# Altium PCB FPv1.3.5.PcbDoc (part 5 of 9)
Units mil, origin at the board's own origin, x right, y up, seen from the top; angles counter-clockwise.
Board outline 3200 x 2100 mil, 4 copper layers (Top Layer, GROUND PLANE, POWER PLANE, Bottom Layer); 98 components, 183 nets, 614 pads, 312 vias.
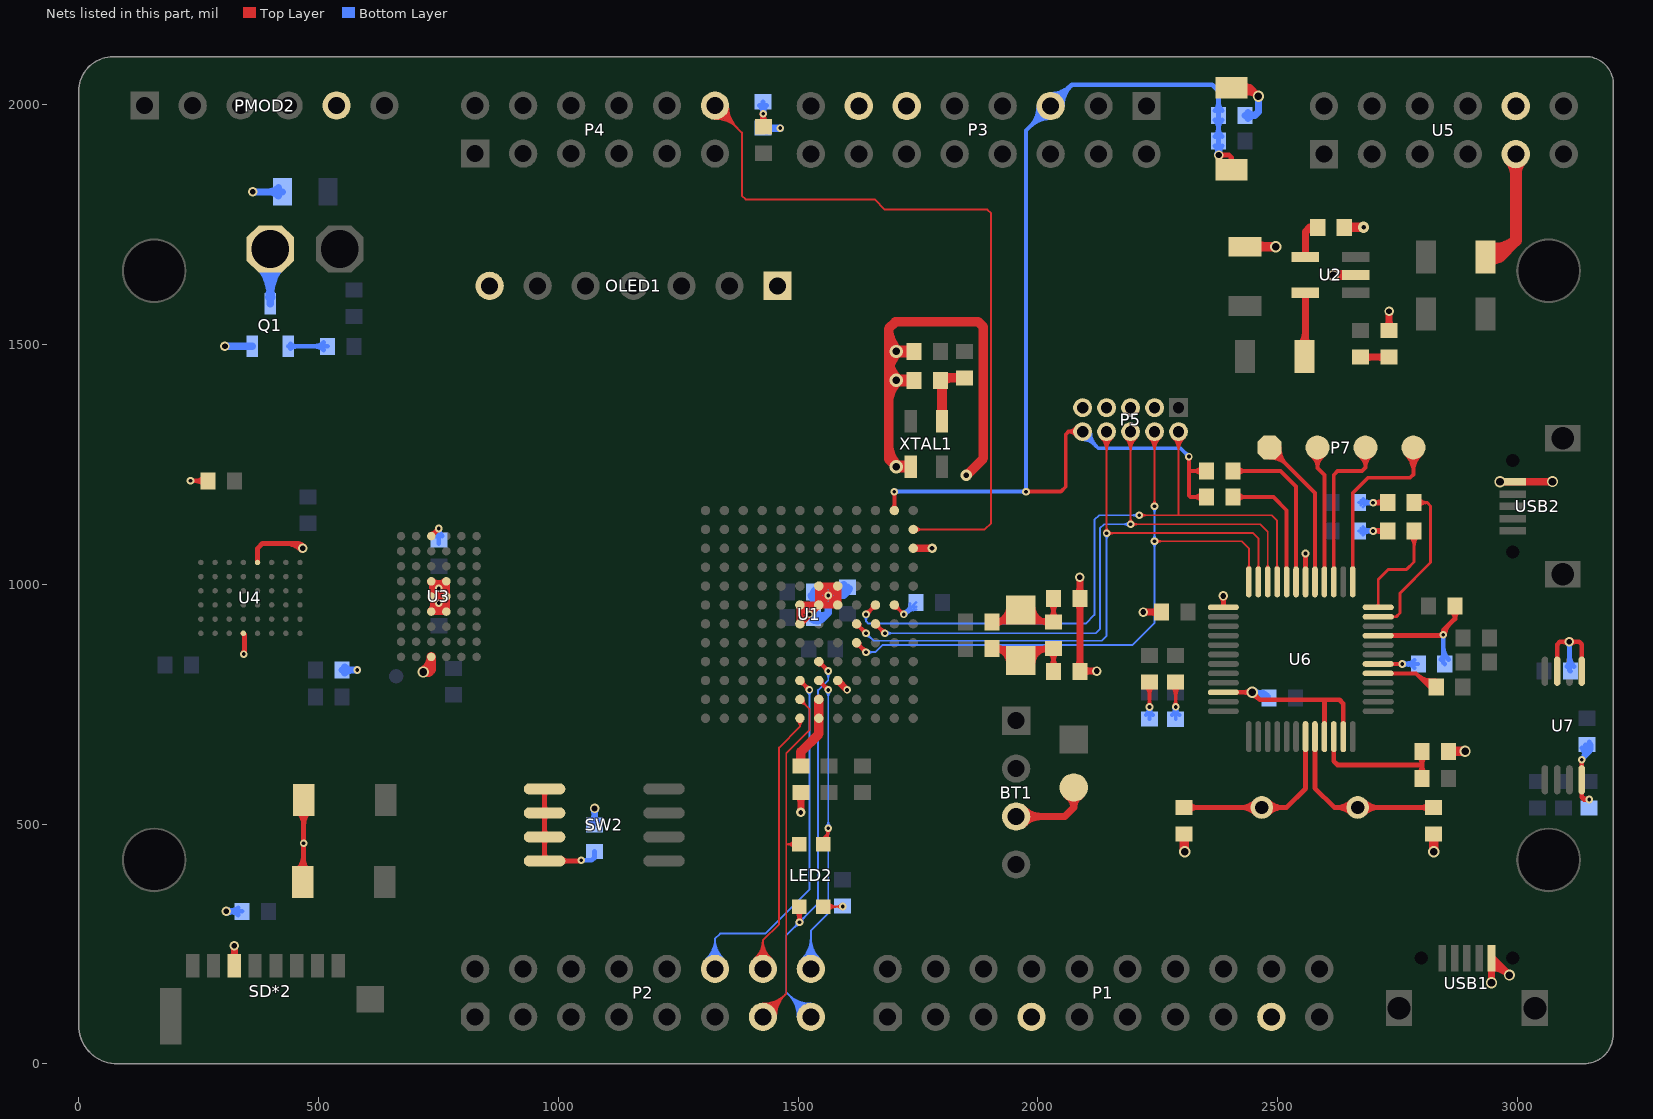
[diagram p7: the nets of this part, all layers, seen from the top]

## Via types
v1: diameter 15.87, hole 7.87, Top Layer to Bottom Layer, tented both sides, 261 vias
v2: diameter 19.8, hole 11.81, Top Layer to Bottom Layer, tented both sides, 25 vias
v3: diameter 23.62, hole 15.75, Top Layer to Bottom Layer, tented both sides, 11 vias
v4: diameter 20, hole 13, Top Layer to Bottom Layer, tented both sides, 5 vias
v5: diameter 27.68, hole 15.75, Top Layer to Bottom Layer, tented both sides, 3 vias
v6: diameter 23.74, hole 15.75, Top Layer to Bottom Layer, tented both sides, 2 vias
v7: diameter 19.8, hole 9.84, Top Layer to Bottom Layer, tented both sides, 2 vias
v8: diameter 23.62, hole 9.45, Top Layer to Bottom Layer, tented both sides, 1 vias
v9: diameter 17.24, hole 9.06, Top Layer to Bottom Layer, tented both sides, 1 vias
v10: diameter 23.74, hole 11.81, Top Layer to Bottom Layer, tented both sides, 1 vias

## Nets (pads, with @x,y where several pads share a name; then routed paths per layer and width w, separated by ;. In a path a pad name is that pad's centre, name@x,y a point inside that pad or via, vN(x,y) a via of type N, cw(c..) or ccw(c..) an arc to the next point about the centre after c; other vN are vias at no path point) (continued)
FTM3_CH3: P2.12 U1.F3 | length 1207.9
  Top Layer w4: U1.F3@1503.94,791.37 cw(c1503.94,772.44) 1517.32,785.82 ; U1.F3@1503.94,799.21 v1(1523.62,779.53) ; U1.F3@1507.69,791.39 cw(c1496.78,772.49) v1@1517.88,778.02 ; U1.F3@1511.76,795.46 ccw(c1530.66,806.37) v1@1525.13,785.27 ; U1.F3@1511.78,799.21 ccw(c1530.71,799.21) 1517.33,785.82 ; 1515.98,786.6 cw(c1509.81,775.91) v1@1521.75,779.04 ; 1516.17,786.49 cw(c1514.09,782.88) v1@1518.02,781.49 ; 1516.55,787.17 ccw(c1527.24,793.34) v1@1524.11,781.4 ; 1516.66,786.98 ccw(c1520.27,789.06) v1@1521.66,785.13 ; v1@1517.69,779.53 ccw(c1503.37,779.53) 1513.49,789.66 ccw(c1523.62,799.78) v1@1523.62,785.46 ; 1517.19,785.9 ccw(c1520.42,791.49) 1522.09,785.26 cw(c1520.42,791.49) 1517.19,785.9 ; 1517.25,785.96 cw(c1511.66,782.73) 1517.89,781.06 ccw(c1511.66,782.73) 1517.25,785.96
  Bottom Layer w4: P2.12@1308.1,218.03 ccw(c1268.42,260.86) 1326.81,260.86 ; P2.12@1310.82,215.09 ccw(c1276.9,251.7) 1326.81,251.7 ccw(c1376.72,251.7) P2.12@1342.8,215.09 ; P2.12@1313.54,212.16 ccw(c1285.39,242.55) 1326.81,242.55 ccw(c1368.23,242.55) P2.12@1340.08,212.16 ; P2.12@1316.26,209.23 ccw(c1293.87,233.39) 1326.81,233.39 ccw(c1359.75,233.39) P2.12@1337.36,209.23 ; P2.12@1326.81,197.83 1326.81,260.87 ; P2.12@1345.52,218.03 cw(c1385.21,260.86) 1326.81,260.86 ; v1@1519.43,775.33 cw(c1509.3,765.2) 1523.62,765.2 cw(c1537.95,765.2) v1@1527.82,775.33 ; v1(1523.62,779.53) 1523.62,363.19 1432.09,271.65 1337.6,271.65 1326.81,260.87
FTM3_CH4: LED2.4 P2.13 U1.F2 | length 1159.7
  Top Layer w4: P2.13@1426.81,97.83 1475.39,146.42 1475.39,457.68 ; P2.13@1426.81,113.36 ccw(c1426.81,150.85) 1453.32,124.34 ccw(c1479.83,97.83) P2.13@1442.34,97.83 ; P2.13@1426.81,117.36 ccw(c1426.81,164.51) 1460.15,131.17 ccw(c1493.48,97.83) P2.13@1446.34,97.83 ; P2.13@1426.81,121.36 ccw(c1426.81,178.16) 1466.97,138 ccw(c1507.14,97.83) P2.13@1450.34,97.83 ; P2.13@1426.81,125.36 ccw(c1426.81,191.82) 1473.8,144.83 ccw(c1520.8,97.83) P2.13@1454.34,97.83 ; LED2.4@1492.43,449.57 ccw(c1475.43,435.92) 1475.43,457.72 ; LED2.4@1492.43,465.86 cw(c1475.43,479.51) 1475.43,457.72 ; LED2.4@1495.54,452.08 ccw(c1483.78,442.63) 1483.78,457.72 ccw(c1483.78,472.81) LED2.4@1495.54,463.35 ; LED2.4@1502.56,457.72 1475.43,457.72 ; U1.F2@1503.94,752 cw(c1503.94,733.07) 1517.33,746.45 ; U1.F2@1503.94,759.84 1523.62,740.16 1523.62,695.87 1475.39,647.64 1475.39,457.68 ; U1.F2@1511.78,759.84 ccw(c1530.71,759.84) 1517.32,746.45 ; 1475.39,457.68 1475.43,457.72
FTM3_CH5: P2.14 U1.F1 | length 856.8
  Top Layer w4: P2.14@1408.94,218.77 ccw(c1375.88,257.52) 1426.81,257.52 ; P2.14@1411.54,215.73 ccw(c1383.28,248.84) 1426.81,248.84 ccw(c1470.34,248.84) P2.14@1442.08,215.73 ; P2.14@1414.13,212.69 ccw(c1390.68,240.17) 1426.81,240.17 ccw(c1462.94,240.17) P2.14@1439.49,212.69 ; P2.14@1416.73,209.65 ccw(c1398.08,231.5) 1426.81,231.5 ccw(c1455.54,231.5) P2.14@1436.89,209.65 ; P2.14@1426.81,197.83 1426.81,257.52 ; P2.14@1444.68,218.77 cw(c1477.74,257.52) 1426.81,257.52 ; U1.F1@1498.66,714.67 cw(c1487.85,702.76) 1503.94,702.76 ; U1.F1@1503.94,720.47 1503.94,702.76 ; U1.F1@1509.21,714.67 ccw(c1520.02,702.76) 1503.94,702.76 ; 1426.81,257.52 1460.63,291.34 1460.63,659.45 1503.94,702.76
FTM3_CH6: LED2.1 P2.15 U1.G4 | length 1523.6
  Top Layer w4: LED2.1@1493.37,318.52 cw(c1470.22,295.38) v1@1502.95,295.38 ; LED2.1@1496.2,321.35 cw(c1479.88,305.04) 1502.95,305.04 ; v1@1497.81,298.24 ccw(c1485.33,305.45) 1499.25,309.18 ; v1@1498.76,299.47 ccw(c1488.63,309.6) 1502.95,309.6 ccw(c1517.28,309.6) v1@1507.15,299.47 ; 1499.29,309.05 ccw(c1513.03,312.74) v1@1505.92,300.41 ; v1@1499.99,300.41 ccw(c1493.71,311.28) 1505.83,308.03 ; v1@1502.95,293.31 LED2.1@1502.95,327.32 ; v1@1502.95,297.28 cw(c1532.99,297.28) LED2.1@1511.75,318.52 ; 1502.95,306.94 cw(c1523.34,306.94) LED2.1@1508.92,321.35 ; 1506.48,310.46 ccw(c1522.03,306.29) v1@1508.09,298.24 ; U1.G4@1543.31,830.74 cw(c1543.31,811.81) 1556.7,825.19 cw(c1570.08,838.58) U1.G4@1551.15,838.58 ; U1.G4@1543.31,838.58 v1(1562.99,818.9) ; U1.G4@1547.06,830.76 cw(c1536.15,811.86) v1@1557.25,817.39 ; U1.G4@1551.13,834.83 ccw(c1570.03,845.74) v1@1564.5,824.64 ; 1555.35,825.97 cw(c1549.18,815.28) v1@1561.12,818.41 ; 1555.54,825.86 cw(c1553.46,822.25) v1@1557.39,820.86 ; 1555.92,826.54 ccw(c1566.61,832.71) v1@1563.48,820.77 ; 1556.03,826.35 ccw(c1559.64,828.43) v1@1561.03,824.5 ; v1@1557.06,818.9 ccw(c1542.74,818.9) 1552.86,829.03 ccw(c1562.99,839.15) v1@1562.99,824.83 ; 1556.56,825.27 ccw(c1559.79,830.86) 1561.46,824.63 cw(c1559.79,830.86) 1556.56,825.27 ; 1556.62,825.33 cw(c1551.03,822.1) 1557.26,820.43 ccw(c1551.03,822.1) 1556.62,825.33
  Bottom Layer w4: v1@1497.02,295.28 cw(c1482.7,295.28) 1492.82,285.15 cw(c1502.95,275.02) v1@1502.95,289.34 ; P2.15@1499.28,97.83 ccw(c1432.83,97.83) 1479.82,144.83 ccw(c1526.81,191.82) P2.15@1526.81,125.36 ; v1@1502.95,301.21 ccw(c1502.95,315.53) 1513.08,305.4 ccw(c1523.21,295.28) v1@1508.89,295.28 ; P2.15@1503.28,97.83 ccw(c1446.48,97.83) 1486.65,138 ccw(c1526.81,178.16) P2.15@1526.81,121.36 ; P2.15@1507.28,97.83 ccw(c1460.14,97.83) 1493.48,131.17 ccw(c1526.81,164.51) P2.15@1526.81,117.36 ; P2.15@1511.28,97.83 ccw(c1473.8,97.83) 1500.3,124.34 ccw(c1526.81,150.85) P2.15@1526.81,113.36 ; P2.15@1526.81,97.83 1475.39,149.25 1475.39,267.72 1542,334.32 1542,779 1562.99,799.99 v1(1562.99,818.9) ; v1@1558.8,814.7 cw(c1548.67,804.57) 1562.99,804.57 cw(c1577.32,804.57) v1@1567.19,814.7
  other v1: 1502.95,295.28
FTM3_CH7: LED2.3 P2.16 U1.G3 | length 1330.8
  Top Layer w4: U1.G3@1543.31,791.37 cw(c1543.31,772.44) 1556.7,785.82 cw(c1570.08,799.21) U1.G3@1551.15,799.21 ; U1.G3@1543.31,799.21 v1(1562.99,779.53) ; U1.G3@1547.06,791.39 cw(c1536.15,772.49) v1@1557.25,778.02 ; LED2.3@1548.13,469.94 ccw(c1540.44,491.14) v1(1562.99,491.14) LED2.3@1562.99,468.15 ; LED2.3@1549.49,466.18 ccw(c1542.51,485.44) v1@1562.99,485.44 ; LED2.3@1550.85,462.42 ccw(c1544.58,479.73) 1562.99,479.73 ; U1.G3@1551.13,795.46 ccw(c1570.03,806.37) v1@1564.5,785.27 ; LED2.3@1552.22,458.66 ccw(c1546.65,474.02) 1562.99,474.02 ; 1555.35,786.6 cw(c1549.18,775.91) v1@1561.12,779.04 ; 1555.54,786.49 cw(c1553.46,782.88) v1@1557.39,781.49 ; 1555.92,787.17 ccw(c1566.61,793.34) v1@1563.48,781.4 ; 1556.03,786.98 ccw(c1559.64,789.06) v1@1561.03,785.13 ; v1@1557.06,779.53 ccw(c1542.74,779.53) 1552.86,789.66 ccw(c1562.99,799.78) v1@1562.99,785.46 ; v1@1558.37,487.42 cw(c1551.74,482.07) 1559.97,479.86 cw(c1568.2,477.66) v1@1565.13,485.61 ; v1@1558.61,487.15 cw(c1551.08,480.3) 1560.91,477.66 ; v1@1558.8,486.95 cw(c1548.67,476.82) 1562.99,476.82 cw(c1577.32,476.82) v1@1567.19,486.95 ; 1561.63,480.37 cw(c1570.6,477.97) v1@1565.96,486 ; 1556.56,785.9 ccw(c1559.79,791.49) 1561.46,785.26 cw(c1559.79,791.49) 1556.56,785.9 ; 1556.62,785.96 cw(c1551.03,782.73) 1557.26,781.06 ccw(c1551.03,782.73) 1556.62,785.96
  Bottom Layer w4: P2.16@1507.35,217.3 ccw(c1460.35,264.29) 1526.81,264.29 ccw(c1593.27,264.29) P2.16@1546.28,217.3 ; P2.16@1510.17,214.47 ccw(c1470.01,254.64) 1526.81,254.64 ccw(c1583.61,254.64) P2.16@1543.45,214.47 ; P2.16@1513,211.64 ccw(c1479.67,244.98) 1526.81,244.98 ccw(c1573.95,244.98) P2.16@1540.62,211.64 ; P2.16@1515.83,208.81 ccw(c1489.32,235.32) 1526.81,235.32 ccw(c1564.3,235.32) P2.16@1537.79,208.81 ; P2.16@1526.81,197.83 1526.81,277.8 1562.99,313.98 v1(1562.99,491.14) v1(1562.99,779.53) ; v1@1558.8,486.95 cw(c1548.67,476.82) 1562.99,476.82 cw(c1577.32,476.82) v1@1567.19,486.95 ; v1@1558.8,495.34 ccw(c1548.67,505.47) 1562.99,505.47 ccw(c1577.32,505.47) v1@1567.19,495.34 ; v1@1558.8,775.33 cw(c1548.67,765.2) 1562.99,765.2 cw(c1577.32,765.2) v1@1567.19,775.33
GND: BT1.3 C1.1 C2.1 C3.1 C4.1 C7.1 C8.2 C12.2 C13.1 C15.1 C16.1 C17.1 C18.1 C22.1 C24.2 C27.1 C28.1 C29.1 C32.2 C33.1 C34.1 C35.2 C36.1 C37.1 C38.1 OLED1.1 OLED1.7 P1.7 P1.17 P3.11 P3.13 P5.3 P5.5 P5.7 P5.9 P6.2 PMOD2.5 Q1.2 R6.1 R10.1 R30.1 R31.1 R34.1 S1.2 S2.2 S3.1 SD*2.6 U1.F6 U1.F7 U1.G7 U1.G8 U1.H3 U1.H7 U1.H8 U1.M10 U2.2 U3.A3 U3.D3 U3.D4 U3.E3 U3.E4 U3.F3 U3.F4 U3.J3 U4.D1 U4.E6 U5.9 U5.10 U6.9 U6.18 U6.25 U6.34 U6.45 U6.47 U7.5 U7.7 USB1.5 USB2.5 XTAL1.2 | length 8018.5
  Top Layer w10: v1(233.27,1215.55) C3.1@269.69,1215.55 ; C3.1@262.09,1207.95 ccw(c243.74,1189.6) 243.74,1215.55 ccw(c243.74,1241.5) C3.1@262.09,1223.15 ; v1@342.41,856.4 ccw(c334.54,864.28) 345.68,864.28 ; U4.E6@343,897.14 cw(c336.55,890.68) 345.68,890.68 ; U4.E6@343.5,897.64 345.68,895.46 345.68,855.52 v1(344.49,854.33) ; U4.D1@373.03,1045.28 373.03,1074.97 382.93,1084.87 457.13,1084.87 v2(467,1075) ; 431.35,1084.87 cw(c431.35,1039.35) v2@463.53,1071.53 ; S2.2@454.69,402.24 ccw(c419.83,437.1) 469.13,437.1 ; 455.49,1084.87 cw(c455.49,1063.49) v2@470.61,1078.61 ; S1.2@456.66,526.9 cw(c426.55,496.79) 469.13,496.79 cw(c511.72,496.79) S1.2@481.61,526.9 ; S2.2@461.76,395.16 ccw(c443.97,412.96) 469.13,412.96 ; v2@462.1,1075 ccw(c450.27,1075) 458.63,1083.37 ccw(c467,1091.73) v2@467,1079.9 ; S2.2@469.13,380.91 v1(469.13,459.65) S1.2@469.13,550.2 ; 469.13,427.59 ccw(c504.99,427.59) S2.2@479.64,402.24 ; U3.F3@735.24,942.91 U3.F3@739.93,947.6 ; U3.E3@735.24,970.55 cw(c735.24,961.24) 741.82,967.82 cw(c748.41,974.41) U3.E3@739.09,974.41 ; U3.D3@735.24,1002.05 cw(c735.24,992.73) 741.82,999.32 cw(c748.41,1005.91) U3.D3@739.09,1005.91 ; U3.D3@735.24,1005.91 738.19,1002.95 739.93,1001.22 750.49,990.65 v1@750.98,990.16 ; U3.A3@735.24,1100.39 v1(750.98,1116.14) ; U3.A3@735.24,1104.25 ccw(c735.24,1113.57) 741.82,1106.98 ccw(c748.41,1100.39) U3.A3@739.09,1100.39 ; U3.E3@738.19,977.36 U3.E3@735.24,974.41 739.93,969.72 v1@750.98,958.66 ; 742.62,967.03 ccw(c750.98,975.4) v1@750.98,963.56 ; 744.3,996.84 ccw(c750.98,1003.53) v1@750.98,994.07 ; U3.D4@762.04,1001.22 U3.D4@766.73,1005.91 ; v2@2383.35,971.93 cw(c2374.98,963.56) 2386.81,963.56 cw(c2398.64,963.56) v2@2390.28,971.93 ; U6.34@2386.81,774.61 v3(2446.85,774.61) 2462.6,758.86 2628.94,758.86 2636.81,750.98 U6.47@2636.81,682.09 ; U6.25@2386.81,951.77 v2(2386.81,975.39) ; v3@2442.03,769.79 ccw(c2430.41,758.16) 2430.41,774.61 ccw(c2430.41,791.05) v3@2442.03,779.42 ; v3@2446.85,767.8 cw(c2446.85,751.35) 2458.48,762.98 cw(c2470.1,774.61) v3@2453.66,774.61 ; v9@2555.51,1061.42 cw(c2549.33,1055.23) 2558.07,1055.23 cw(c2566.82,1055.23) v9@2560.63,1061.42 ; U6.18@2558.07,1004.92 v9(2558.07,1063.98) ; U6.45@2597.44,682.09 2597.44,756.89 ; U6.9@2709.65,892.72 2844.49,892.72 2845.47,893.7 v1(2845.47,894.68) 2845.47,903.47 2869.58,927.58 ; 2833.64,892.72 ccw(c2833.64,906.52) v1@2843.4,896.76 ; v1@2848.41,894.68 cw(c2876.7,894.68) 2856.69,914.69 ; C29.1@2862.27,944.33 cw(c2846.74,927.58) 2869.58,927.58 ; C29.1@2869.58,954.18 2869.58,927.58 ; C29.1@2876.89,944.33 ccw(c2892.43,927.58) 2869.58,927.58 ; U7.7@3082.84,818.54 3082.84,874.17 3088.58,879.92 v2(3108.27,879.92) 3128.94,879.92 3134.02,874.84 U7.5@3134.02,818.54 ; v2@3104.8,876.46 ccw(c3096.43,868.09) 3096.43,879.92 ccw(c3096.43,891.75) v2@3104.8,883.39 ; v2@3111.73,876.46 cw(c3120.1,868.09) 3120.1,879.92 cw(c3120.1,891.75) v2@3111.73,883.39
  Top Layer w15: SD*2.6@320.24,219.48 ccw(c309.24,230.48) 324.8,230.48 ; SD*2.6@324.69,204.21 324.8,204.33 v2(324.8,246.06) v2@324.69,245.94 ; 324.8,229.91 ccw(c339.56,229.91) SD*2.6@329.13,219.48 ; U3.F3@734.28,943.87 ccw(c720.64,957.51) 739.93,957.51 ; U3.E3@734.28,973.45 cw(c720.64,959.81) 739.93,959.81 ; U3.E3@734.28,975.37 ccw(c724.83,984.82) 738.19,984.82 ; U3.D3@734.28,1004.95 cw(c724.83,995.5) 738.19,995.5 ; U3.F3@735.24,942.91 U3.F4@766.73,942.91 ; U3.D3@736.2,1006.87 ccw(c749.84,1020.51) 749.84,1001.22 ; U3.E3@738.19,972.34 cw(c757.73,972.34) v1@751.13,990.73 ; U3.D3@738.19,1002.95 U3.E3@738.19,977.36 ; U3.F3@739.93,943.54 cw(c757.94,943.54) v1@751.15,960.23 ; U3.E3@739.93,969.72 739.93,947.6 v1@750.98,958.66 ; v1@750.55,991.12 ccw(c739.93,990.58) 739.93,1001.22 U3.D4@762.04,1001.22 ; v1@751.41,960.59 cw(c766.73,959.01) U3.E4@766.73,974.41 ; v1@751.42,991.12 cw(c762.04,990.58) U3.D4@762.04,1001.22 ; 752.13,1001.22 ccw(c752.13,1020.51) U3.D4@765.77,1006.87 ; U3.D4@766.73,1005.91 U3.E4@766.73,974.41 ; R30.1@1500.07,560.11 cw(c1485.99,546.03) 1505.91,546.03 cw(c1525.82,546.03) R30.1@1511.74,560.11 ; U1.F6@1503.94,917.32 U1.F6@1504.32,917.71 ; U1.F7@1503.94,956.69 U1.F7@1504.32,956.31 ; v7(1505.91,524.09) R30.1@1505.91,565.94 ; U1.H3@1582.68,799.21 v1(1602.36,779.53) ; U1.M10@1740.16,1074.8 v7(1779.53,1074.8) ; BT1.3@1954.72,515.55 2055.91,515.55 2074.8,534.45 ; BT1.3@1970.3,499.98 cw(c2007.9,462.37) 2007.9,515.55 cw(c2007.9,568.73) BT1.3@1970.3,531.13 ; P6.2@2062.38,557.99 cw(c2046.29,534.45) 2074.8,534.45 ; P6.2@2074.8,576.18 2074.8,534.45 ; C38.1@2081.77,825.32 ccw(c2067.69,839.4) 2087.6,839.4 ccw(c2107.51,839.4) 2093.43,825.32 ccw(c2108.94,840.83) 2108.94,818.9 ; C37.1@2081.77,962.28 cw(c2067.69,948.2) 2087.6,948.2 cw(c2107.51,948.2) C37.1@2093.43,962.28 ; C37.1@2081.77,977.88 ccw(c2067.69,991.96) 2087.6,991.96 ccw(c2107.51,991.96) C37.1@2093.43,977.88 ; P6.2@2087.23,557.99 ccw(c2103.32,534.45) 2074.8,534.45 ; v2(2087.6,1014.76) C37.1@2087.6,970.08 C38.1@2087.6,817.52 2088.98,818.9 v2(2123.03,818.9) ; C38.1@2093.43,813.66 cw(c2106.09,801) 2106.09,818.9 ; v2(2219.49,941.93) C28.1@2257.87,941.93 ; C28.1@2252.04,936.1 ccw(c2237.96,922.02) 2237.96,941.93 ccw(c2237.96,961.84) C28.1@2252.04,947.76 ; S3.1@2403.54,2035.08 2441.92,2035.08 ; S3.1@2414.44,2034.96 cw(c2427.61,2012.22) 2446.2,2030.8 ; S3.1@2421.96,2021.98 cw(c2437.74,1994.74) v6(2460,2017) 2441.92,2035.08 ; S3.1@2427.15,2026.96 cw(c2441.92,2017.58) 2441.92,2035.08 ; S3.1@2427.15,2043.2 ccw(c2441.92,2052.58) 2441.92,2035.08 ; R31.1@2726.45,1534.38 ccw(c2712.37,1548.46) 2732.28,1548.46 ccw(c2752.2,1548.46) R31.1@2738.12,1534.38 ; R31.1@2732.28,1528.54 v2(2732.28,1568.9) ; USB1.5@2945.79,215.41 cw(c2945.88,198.48) 2957.85,210.45 ; v3(2945.87,169.29) USB1.5@2945.87,220.47 ; USB1.5@2945.87,200.41 cw(c2946.15,147.93) v3(2983.27,185.04) USB1.5@2947.83,220.47 ; v3(2963.58,1213.58) USB2.5@2990.16,1213.58 v3@3070.42,1213.58 ; U3.E3@738.19,977.36 v1@750.98,990.16 ; U3.E3@738.19,977.36 741.14,974.41 U3.E4@766.73,974.41 ; v1@750.98,958.66 U3.F4@766.73,942.91 ; v1@750.98,958.66 U3.E4@766.73,974.41 ; v1@750.98,990.16 752.46,988.68 U3.E4@766.73,974.41 ; v1@750.98,990.16 U3.D4@762.04,1001.22 ; U3.F4@766.73,942.91 U3.E4@766.73,974.41 ; U1.F6@1504.32,917.71 U1.F7@1504.32,956.31 ; U1.F6@1504.32,917.71 v1(1523.62,937.01) ; U1.F7@1504.32,956.31 U1.G7@1542.92,956.31 ; U1.F7@1504.32,956.31 v1(1523.62,937.01) ; v1(1523.62,937.01) U1.G7@1542.92,956.31 ; U1.G7@1542.92,956.31 U1.G7@1543.31,956.69 ; U1.G7@1542.92,956.31 1543.31,956.31 U1.G7@1543.31,956.69 ; U1.G7@1543.31,956.69 U1.H7@1582.68,956.69 ; U1.G7@1543.31,956.69 U1.G8@1543.31,996.06 ; U1.G7@1543.31,956.69 v1(1562.99,976.38) ; U1.G8@1543.31,996.06 U1.H8@1582.68,996.06 ; U1.G8@1543.31,996.06 v1(1562.99,976.38) ; v1(1562.99,976.38) U1.H7@1582.68,956.69 ; v1(1562.99,976.38) U1.H8@1582.68,996.06 ; U1.H7@1582.68,956.69 U1.H8@1582.68,996.06
  Top Layer w20: v3@717.63,818.51 ccw(c701.03,848.42) U3.J3@735.24,848.43 ; v3(718.5,816.93) 730.31,816.93 735.24,821.85 ; v3@719.19,818.61 ccw(c724.77,832.32) 735.24,821.85 ; U3.J3@735.24,848.43 735.24,821.85 ; 1689,1292.3 ccw(c1751.95,1292.3) v5@1707.44,1247.79 ; 1689,1377.97 cw(c1751.95,1377.97) v5@1707.44,1422.48 ; 1689,1438.01 cw(c1751.95,1438.01) v5@1707.44,1482.52 ; 1689,1472.43 ccw(c1751.95,1472.43) v5@1707.44,1427.91 ; 1689,1532.47 ccw(c1751.95,1532.47) v5@1707.44,1487.95 ; v5(1704.72,1245.07) 1689,1260.8 1689,1533 1703,1547 1876,1547 1886.43,1536.57 1886.43,1262.43 v10(1851,1227) ; C33.1@2305.12,479.33 2305.12,442.91 v3(2306.1,441.93) ; C12.2@2433.07,1703.74 v3(2496.06,1703.74) ; C12.2@2453.41,1696.2 cw(c2471.62,1677.98) 2471.62,1703.74 cw(c2471.62,1729.5) C12.2@2453.41,1711.28 ; v3(2616.14,1643.7) 2617.13,1644.69 U2.2@2662.56,1644.69 ; C13.1@2638.78,1744.09 v8(2679.13,1744.09) ; C35.2@2820.74,475.27 cw(c2808.55,463.08) 2825.79,463.08 ; C35.2@2824.8,479.33 2825.79,478.35 v3(2825.79,441.93) ; C24.2@2856.3,651.57 v3(2890.75,651.57)
  Top Layer w25: v5@1692,1485.24 v5(1704.72,1485.24) C27.1@1742.13,1485.24 ; v5@1693,1425.2 v5(1704.72,1425.2) C36.1@1742.13,1425.2 ; v5(1704.72,1245.07) XTAL1.2@1735.22,1245.07 ; C8.2@2927.29,1680.06 ccw(c2940.84,1717.13) 2968.75,1689.22 ; C8.2@2933.07,1682.09 2961.61,1682.09 2996.46,1716.93 ; C8.2@2935.88,1703.54 ccw(c2955.67,1757.71) 2996.46,1716.93 ; U5.9@2984.42,1884.61 cw(c2955.35,1855.55) 2996.46,1855.55 cw(c3037.56,1855.55) U5.9@3008.5,1884.61 ; U5.9@2996.46,1896.65 2996.46,1716.93
  Bottom Layer w10: v2(308.07,317.91) C17.1@340.55,317.91 ; v2@310.52,313.67 cw(c319.32,298.42) 323.88,315.43 ; v2@310.52,322.16 ccw(c319.32,337.41) 323.88,320.4 ; v2@311.54,314.45 cw(c319.9,306.08) 319.9,317.91 cw(c319.9,329.75) v2@311.54,321.38 ; C17.1@332.95,310.31 ccw(c314.6,291.97) 314.6,317.91 ccw(c314.6,343.86) C17.1@332.95,325.51 ; C15.1@743.92,1100.62 ccw(c730.4,1116.14) v1(750.98,1116.14) ; v1(750.98,991.14) v1@754.92,991.14 ; C15.1@750.98,1084.65 C15.1@750.98,1092.52 v1(750.98,1116.14) ; C15.1@758.05,1100.62 cw(c771.57,1116.14) v1(750.98,1116.14) ; R6.1@1068.19,505.63 ccw(c1049.84,523.98) 1075.79,523.98 ccw(c1101.74,523.98) R6.1@1083.39,505.63 ; v2@1071.54,530.03 cw(c1054.79,520.36) 1073.48,515.35 ; v2@1072.32,529.01 cw(c1063.95,520.65) 1075.79,520.65 cw(c1087.62,520.65) v2@1079.25,529.01 ; R6.1@1075.79,498.03 v2(1075.79,532.48) ; 1078.1,515.35 cw(c1096.79,520.36) v2@1080.03,530.03 ; v3@2450.49,768.85 cw(c2458.16,756.74) 2461.87,770.58 cw(c2465.58,784.43) v3@2452.88,777.77 ; v3@2451.67,769.79 cw(c2463.29,758.16) 2463.29,774.61 cw(c2463.29,791.05) v3@2451.67,779.42 ; 2464.06,774.61 cw(c2464.06,754.38) C22.1@2481.63,764.39 ; C22.1@2470.47,774.61 v3(2446.85,774.61) cw(c2446.85,744.57) C22.1@2472.95,759.44 ; C32.2@2840.83,843.23 ccw(c2829.61,854.45) 2845.47,854.45 ; 2845.47,868.71 ccw(c2881.5,868.71) C32.2@2856.03,843.23 ; v1(2845.47,894.68) 2845.47,836.61 C32.2@2848.43,833.66 ; C34.1@3102.79,828.11 ccw(c3089.58,841.33) 3108.27,841.33 ; v2@3104.8,876.46 cw(c3096.43,868.09) 3108.27,868.09 cw(c3120.1,868.09) v2@3111.73,876.46 ; 3108.27,851.59 ccw(c3141.48,851.59) C34.1@3117.99,828.11 ; v2(3108.27,879.92) 3108.27,820.67 C34.1@3110.39,818.54
  Bottom Layer w15: v2(305.12,1496.06) Q1.2@362.2,1496.06 ; v2(363.19,1817.91) C4.1@425.2,1817.91 ; C4.1@416.58,1809.3 ccw(c395.78,1788.5) 395.78,1817.91 ccw(c395.78,1847.33) C4.1@416.58,1826.53 ; C16.1@549.21,820.87 v1@580.87,820.87 ; C16.1@555.04,815.03 cw(c569.12,800.95) 569.12,820.87 cw(c569.12,840.78) C16.1@555.04,826.7 ; R34.1@1427.17,1950.79 v1@1462.79,1950.79 ; R34.1@1434.97,1944.96 cw(c1449.05,1930.88) 1449.05,1950.79 cw(c1449.05,1970.7) R34.1@1434.97,1956.62 ; C1.1@1523.32,937.31 ccw(c1501,959.63) 1532.56,959.63 ; C1.1@1523.56,936.58 cw(c1522.12,926.24) C1.1@1532.56,926.24 ; C1.1@1523.93,937.31 ccw(c1539.17,952.56) C1.1@1539.17,931 ; C1.1@1524.03,937.14 ccw(c1532.56,939.99) C1.1@1532.56,931 ; C1.1@1526.73,938.8 ccw(c1512.65,952.88) 1532.56,952.88 ccw(c1552.47,952.88) C1.1@1538.39,938.8 ; C2.1@1526.73,976.2 cw(c1512.65,962.12) 1532.56,962.12 cw(c1552.47,962.12) C2.1@1538.39,976.2 ; C1.1@1528.11,927.89 ccw(c1539.47,940.86) 1551.66,928.66 ; C1.1@1538,939.17 ccw(c1550.06,952.93) 1562.99,939.99 ; C1.1@1538.39,925.17 cw(c1552.47,911.09) 1552.47,931 cw(c1552.47,950.91) C1.1@1538.39,936.83 ; C2.1@1538.39,980.14 cw(c1570.8,947.73) 1570.8,993.56 ; C2.1@1538.79,987.43 ccw(c1562.99,1008.39) v1(1562.99,976.38) ; C2.1@1540.18,976.38 v1(1562.99,976.38) ; 1585.43,976.38 ccw(c1585.43,1000.01) R10.1@1607.27,990.98 ; R10.1@1593.41,996.71 cw(c1562.99,1009.29) v1(1562.99,976.38) ; R10.1@1595.2,987.73 ccw(c1581.12,973.65) 1581.12,993.56 ccw(c1581.12,1013.47) R10.1@1595.2,999.39 ; C7.1@2432.09,1977.36 2452.36,1977.36 2460,1985 v6(2460,2017) ; C7.1@2437.92,1971.53 cw(c2452,1957.45) 2452,1977.36 cw(c2452,1997.27) C7.1@2437.92,1983.19 ; C1.1@1532.56,931 1554,931 1562.99,939.99 ; C1.1@1532.56,931 C2.1@1532.56,984 1542.12,993.56 R10.1@1603,993.56 1603,983.76 1595.62,976.38 v1(1562.99,976.38) ; 1562.99,939.99 v1(1562.99,976.38)
  Bottom Layer w20: v1(750.98,960.63) v1@750.98,990.16
  other v1: 581,821 1463,1951
  other v3: 3073,1214
GPIOH0: P7.3 U6.15 | length 431.8
  Top Layer w8: U6.15@2617.13,1004.92 2617.13,1228.13 2625,1236 2676,1236 2683,1243 ; P7.3@2670.4,1268.2 cw(c2651.5,1243) 2683,1243 ; P7.3@2675.2,1274.6 cw(c2663.5,1259) 2683,1259 cw(c2702.5,1259) P7.3@2690.8,1274.6 ; P7.3@2683,1285 2683,1243 ; P7.3@2695.6,1268.2 ccw(c2714.5,1243) 2683,1243
GPIOH1: P7.4 U6.13 | length 513
  Top Layer w8: U6.13@2656.5,1004.92 2656.5,1190.5 2688,1222 2776,1222 2783,1229 P7.4@2783,1285 ; P7.4@2768.15,1270.15 cw(c2732.3,1234.3) 2783,1234.3 cw(c2833.7,1234.3) P7.4@2797.85,1270.15 ; P7.4@2773.81,1275.81 cw(c2751.62,1253.62) 2783,1253.62 cw(c2814.38,1253.62) P7.4@2792.19,1275.81
GPIOH2: L2.2 U6.12 | length 297.5
  Top Layer w6: U6.12@2707.59,953.83 ccw(c2702.63,958.79) 2709.65,958.79 ccw(c2716.66,958.79) U6.12@2711.7,953.83 ; U6.12@2709.65,951.77 2709.65,1009.65 2731,1031 2769,1031 2784.56,1046.56 L2.2@2784.56,1111 ; L2.2@2775.54,1100.02 cw(c2753.78,1078.26) 2784.56,1078.26 cw(c2815.34,1078.26) L2.2@2793.57,1100.02 ; L2.2@2779.79,1104.26 cw(c2768.27,1092.74) 2784.56,1092.74 cw(c2800.85,1092.74) L2.2@2789.33,1104.26
GPIOH3: L6.2 U6.11 | length 386.8
  Top Layer w6: U6.11@2709.65,932.09 2747.09,932.09 2755,940 2755,981 2819,1045 2819,1163 2812,1170 ; U6.11@2738.27,930.03 cw(c2743.23,925.07) 2743.23,932.09 cw(c2743.23,939.1) U6.11@2738.27,934.14 ; L6.2@2784.56,1170 2812,1170 ; L6.2@2794.3,1161.78 cw(c2812,1146.84) 2812,1170 ; L6.2@2794.3,1178.22 ccw(c2812,1193.16) 2812,1170
GPIOL0: R8.2 U6.20 | length 317.5
  Top Layer w8: R8.2@2406.56,1182 2491,1182 2518.7,1154.3 U6.20@2518.7,1004.92 ; R8.2@2414.87,1173.69 cw(c2434.92,1153.64) 2434.92,1182 cw(c2434.92,1210.36) R8.2@2414.87,1190.31
GPIOL1: R11.2 U6.19 | length 388.5
  Top Layer w8: R11.2@2406.56,1236 2506,1236 2538.39,1203.61 U6.19@2538.39,1004.92 ; R11.2@2414.87,1227.69 cw(c2434.92,1207.64) 2434.92,1236 cw(c2434.92,1264.36) R11.2@2414.87,1244.31
GPIOL2: P7.1 U6.17 | length 448.3
  Top Layer w8: P7.1@2483,1264 cw(c2483,1213.3) 2518.85,1249.15 cw(c2554.7,1285) P7.1@2504,1285 ; P7.1@2483,1272 cw(c2483,1240.62) 2505.19,1262.81 cw(c2527.38,1285) P7.1@2496,1285 ; P7.1@2483,1285 2577.76,1190.24 U6.17@2577.76,1004.92
GPIOL3: P7.2 U6.16 | length 384.7
  Top Layer w8: P7.2@2570.09,1268.44 cw(c2549.48,1242) 2583,1242 ; P7.2@2575.01,1274.75 cw(c2562.25,1258.38) 2583,1258.38 cw(c2603.75,1258.38) P7.2@2590.99,1274.75 ; P7.2@2583,1285 2583,1242 ; P7.2@2595.91,1268.44 ccw(c2616.52,1242) 2583,1242 ; U6.16@2597.44,1004.92 2597.44,1227.56 2583,1242
JTAG_TCK: P5.4 U1.J5 U6.24 | length 1769.8
  Top Layer w4: U1.J5@1622.05,870.11 cw(c1622.05,851.18) 1635.44,864.56 cw(c1648.82,877.95) U1.J5@1629.89,877.95 ; U1.J5@1622.05,877.95 v1(1641.73,858.27) ; U1.J5@1625.8,870.13 cw(c1614.89,851.23) v1@1635.99,856.76 ; U1.J5@1629.87,874.2 ccw(c1648.77,885.11) v1@1643.24,864.01 ; 1634.09,865.34 cw(c1627.92,854.65) v1@1639.86,857.78 ; 1634.28,865.23 cw(c1632.2,861.62) v1@1636.13,860.23 ; 1634.66,865.91 ccw(c1645.35,872.08) v1@1642.22,860.14 ; 1634.77,865.72 ccw(c1638.38,867.8) v1@1639.77,863.87 ; v1@1635.8,858.27 ccw(c1621.48,858.27) 1631.6,868.4 ccw(c1641.73,878.52) v1@1641.73,864.2 ; P5.4@2230.8,1305.61 cw(c2200.61,1275.41) 2243.31,1275.41 cw(c2286,1275.41) P5.4@2255.81,1305.61 ; P5.4@2233.63,1308.43 cw(c2210.27,1285.07) 2243.31,1285.07 cw(c2276.35,1285.07) P5.4@2252.98,1308.43 ; P5.4@2236.46,1311.26 cw(c2219.93,1294.73) 2243.31,1294.73 cw(c2266.69,1294.73) P5.4@2250.16,1311.26 ; v1@2239.11,1166.79 ccw(c2228.98,1176.92) 2243.31,1176.92 ccw(c2257.63,1176.92) v1@2247.5,1166.79 ; v1(2243.31,1089.57) 2425.2,1089.57 2439.96,1074.8 U6.24@2439.96,1004.92 ; v1(2243.31,1162.6) P5.4@2243.31,1318.11 ; v1@2247.5,1085.37 cw(c2257.63,1075.24) 2257.63,1089.57 cw(c2257.63,1103.89) v1@2247.5,1093.76 ; U6.24@2437.2,1034.26 ccw(c2430.53,1040.92) 2439.96,1040.92 ccw(c2449.39,1040.92) U6.24@2442.72,1034.26 ; 1635.3,864.64 ccw(c1638.53,870.23) 1640.2,864 cw(c1638.53,870.23) 1635.3,864.64 ; 1635.36,864.7 cw(c1629.77,861.47) 1636,859.8 ccw(c1629.77,861.47) 1635.36,864.7
  Bottom Layer w4: v1(1641.73,858.27) 1661.27,858.27 1676,873 2197,873 2243.31,919.31 v1(2243.31,1089.57) v1(2243.31,1162.6) ; v1@1645.93,854.07 cw(c1656.06,843.94) 1656.06,858.27 cw(c1656.06,872.59) v1@1645.93,862.46 ; v1@2239.11,1085.37 cw(c2228.98,1075.24) 2243.31,1075.24 cw(c2257.63,1075.24) v1@2247.5,1085.37 ; v1@2239.11,1093.76 ccw(c2228.98,1103.89) 2243.31,1103.89 ccw(c2257.63,1103.89) v1@2247.5,1093.76 ; v1@2239.11,1158.4 cw(c2228.98,1148.27) 2243.31,1148.27 cw(c2257.63,1148.27) v1@2247.5,1158.4
JTAG_TDI: P5.8 U1.J6 U6.23 | length 1776
  Top Layer w4: U1.J6@1622.05,909.48 cw(c1622.05,890.55) 1635.44,903.93 cw(c1648.82,917.32) U1.J6@1629.89,917.32 ; U1.J6@1622.05,917.32 v1(1641.73,897.64) ; U1.J6@1625.8,909.5 cw(c1614.89,890.6) v1@1635.99,896.13 ; U1.J6@1629.87,913.57 ccw(c1648.77,924.48) v1@1643.24,903.38 ; 1634.09,904.71 cw(c1627.92,894.02) v1@1639.86,897.15 ; 1634.28,904.6 cw(c1632.2,900.99) v1@1636.13,899.6 ; 1634.66,905.28 ccw(c1645.35,911.45) v1@1642.22,899.51 ; 1634.77,905.09 ccw(c1638.38,907.17) v1@1639.77,903.24 ; v1@1635.8,897.64 ccw(c1621.48,897.64) 1631.6,907.77 ccw(c1641.73,917.89) v1@1641.73,903.57 ; P5.8@2130.8,1305.61 cw(c2100.61,1275.41) 2143.31,1275.41 cw(c2186,1275.41) P5.8@2155.81,1305.61 ; P5.8@2133.63,1308.43 cw(c2110.27,1285.07) 2143.31,1285.07 cw(c2176.35,1285.07) P5.8@2152.98,1308.43 ; P5.8@2136.46,1311.26 cw(c2119.93,1294.73) 2143.31,1294.73 cw(c2166.69,1294.73) P5.8@2150.16,1311.26 ; v1@2139.11,1110.49 ccw(c2128.98,1120.62) 2143.31,1120.62 ccw(c2157.63,1120.62) 2147.5,1110.49 ccw(c2157.63,1120.62) 2157.63,1106.3 ccw(c2157.63,1091.98) v1@2147.5,1102.1 ; P5.8@2143.31,1318.11 v1(2143.31,1106.3) 2448.82,1106.3 2459.65,1095.47 U6.23@2459.65,1004.92 ; U6.23@2456.88,1034.26 ccw(c2450.22,1040.92) 2459.65,1040.92 ccw(c2469.07,1040.92) U6.23@2462.41,1034.26 ; 1635.3,904.01 ccw(c1638.53,909.6) 1640.2,903.37 cw(c1638.53,909.6) 1635.3,904.01 ; 1635.36,904.07 cw(c1629.77,900.84) 1636,899.17 ccw(c1629.77,900.84) 1635.36,904.07
  Bottom Layer w4: v1@1641.73,891.7 cw(c1641.73,877.38) 1651.86,887.51 cw(c1661.99,897.64) v1@1647.67,897.64 ; v1(1641.73,897.64) 1657.37,882 2133,882 2143.31,892.31 v1(2143.31,1106.3) ; v1@2139.11,1102.1 cw(c2128.98,1091.98) 2143.31,1091.98 cw(c2157.63,1091.98) v1@2147.5,1102.1
JTAG_TDO: P5.6 U1.K6 U6.22 | length 1746.4
  Top Layer w4: U1.K6@1661.42,909.48 cw(c1661.42,890.55) 1674.81,903.93 cw(c1688.19,917.32) U1.K6@1669.26,917.32 ; U1.K6@1661.42,917.32 v1(1681.1,897.64) ; U1.K6@1665.17,909.5 cw(c1654.26,890.6) v1@1675.36,896.13 ; U1.K6@1669.24,913.57 ccw(c1688.14,924.48) v1@1682.61,903.38 ; 1673.46,904.71 cw(c1667.29,894.02) v1@1679.23,897.15 ; 1673.65,904.6 cw(c1671.57,900.99) v1@1675.5,899.6 ; 1674.03,905.28 ccw(c1684.72,911.45) v1@1681.59,899.51 ; 1674.14,905.09 ccw(c1677.75,907.17) v1@1679.14,903.24 ; v1@1675.17,897.64 ccw(c1660.85,897.64) 1670.97,907.77 ccw(c1681.1,917.89) v1@1681.1,903.57 ; P5.6@2180.8,1305.61 cw(c2150.61,1275.41) 2193.31,1275.41 cw(c2236,1275.41) P5.6@2205.81,1305.61 ; P5.6@2183.63,1308.43 cw(c2160.27,1285.07) 2193.31,1285.07 cw(c2226.35,1285.07) P5.6@2202.98,1308.43 ; P5.6@2186.46,1311.26 cw(c2169.93,1294.73) 2193.31,1294.73 cw(c2216.69,1294.73) P5.6@2200.16,1311.26 ; v1@2189.11,1129.2 ccw(c2178.98,1139.32) 2193.31,1139.32 ccw(c2207.63,1139.32) 2197.5,1129.2 ccw(c2207.63,1139.32) 2207.63,1125 ccw(c2207.63,1110.68) v1@2197.5,1120.8 ; P5.6@2193.31,1318.11 v1(2193.31,1125) 2463.58,1125 2479.33,1109.25 U6.22@2479.33,1004.92 ; U6.22@2476.57,1034.26 ccw(c2469.9,1040.92) 2479.33,1040.92 ccw(c2488.76,1040.92) U6.22@2482.09,1034.26 ; 1674.67,904.01 ccw(c1677.9,909.6) 1679.57,903.37 cw(c1677.9,909.6) 1674.67,904.01 ; 1674.73,904.07 cw(c1669.14,900.84) 1675.37,899.17 ccw(c1669.14,900.84) 1674.73,904.07
  Bottom Layer w4: v1(1681.1,897.64) 2120.64,897.64 2129.37,906.37 2129.37,1116.37 2138,1125 v1(2193.31,1125) v1@2193.9,1125 ; v1@1685.3,893.44 cw(c1695.43,883.31) 1695.43,897.64 cw(c1695.43,911.96) v1@1685.3,901.83 ; v1@2189.11,1120.8 ccw(c2178.98,1110.68) 2178.98,1125 ccw(c2178.98,1139.32) v1@2189.11,1129.2
JTAG_TMS: P5.2 U1.K7 U6.21 | length 1793.5
  Top Layer w4: v1@1640.23,942.75 ccw(c1634.7,963.85) U1.K7@1653.59,952.94 ; v1@1641.24,938.88 ccw(c1638.11,950.82) 1648.8,944.65 ; v1(1641.73,937.01) U1.K7@1661.42,956.69 ; v1@1641.73,942.94 ccw(c1641.73,957.26) 1651.86,947.14 ccw(c1661.99,937.01) v1@1647.67,937.01 ; v1@1643.6,936.52 cw(c1655.54,933.39) 1649.37,944.08 ; v1@1643.7,942.61 ccw(c1645.08,946.54) 1648.69,944.46 ; v1@1647.33,938.97 cw(c1651.27,940.36) 1649.18,943.97 ; v1@1647.47,935.5 cw(c1668.58,929.97) U1.K7@1657.67,948.87 ; U1.K7@1653.57,956.69 cw(c1634.64,956.69) 1648.03,943.3 cw(c1661.42,929.92) U1.K7@1661.42,948.85 ; v1(2211.61,1143.7) 2293.31,1143.7 ; v1@2215.81,1139.51 cw(c2225.94,1129.38) 2225.94,1143.7 cw(c2225.94,1158.02) v1@2215.81,1147.9 ; P5.2@2280.8,1305.61 cw(c2250.61,1275.41) 2293.31,1275.41 cw(c2336,1275.41) P5.2@2305.81,1305.61 ; P5.2@2283.63,1308.43 cw(c2260.27,1285.07) 2293.31,1285.07 cw(c2326.35,1285.07) P5.2@2302.98,1308.43 ; P5.2@2286.46,1311.26 cw(c2269.93,1294.73) 2293.31,1294.73 cw(c2316.69,1294.73) P5.2@2300.16,1311.26 ; P5.2@2293.31,1318.11 2293.31,1143.7 ; U6.21@2496.25,1034.26 ccw(c2489.59,1040.92) 2499.02,1040.92 ccw(c2508.44,1040.92) U6.21@2501.78,1034.26 ; U6.21@2499.02,1004.92 2499.02,1131.89 2487.2,1143.7 2293.31,1143.7 ; v1@1643.27,942.74 ccw(c1644.94,948.97) 1648.17,943.38 cw(c1644.94,948.97) v1@1643.27,942.74 ; v1@1647.46,938.54 cw(c1653.7,940.21) 1648.11,943.44 ccw(c1653.7,940.21) v1@1647.46,938.54
  Bottom Layer w4: v1@1637.54,932.81 cw(c1627.41,922.68) 1641.73,922.68 cw(c1656.06,922.68) v1@1645.93,932.81 ; v1(1641.73,937.01) 1641.73,922.27 1646,918 2100,918 2118,936 2118,1134 2127.7,1143.7 v1(2211.61,1143.7) ; v1@2207.42,1139.51 ccw(c2197.29,1129.38) 2197.29,1143.7 ccw(c2197.29,1158.02) v1@2207.42,1147.9
LPTMR0: P4.12 U1.M11 | length 1915.9
  Top Layer w4: P4.12@1326.81,1970.31 cw(c1326.81,1903.85) 1373.8,1950.84 cw(c1420.8,1997.83) P4.12@1354.34,1997.83 ; P4.12@1326.81,1974.31 cw(c1326.81,1917.51) 1366.97,1957.67 cw(c1407.14,1997.83) P4.12@1350.34,1997.83 ; P4.12@1326.81,1978.31 cw(c1326.81,1931.16) 1360.15,1964.5 cw(c1393.48,1997.83) P4.12@1346.34,1997.83 ; P4.12@1326.81,1982.31 cw(c1326.81,1944.82) 1353.32,1971.33 cw(c1379.82,1997.83) P4.12@1342.34,1997.83 ; P4.12@1326.81,1997.83 1382.87,1941.77 1382.87,1810.04 1390.75,1802.17 1659.45,1802.17 1680.61,1781 1895,1781 1902.43,1773.57 1902.43,1127.33 1889.28,1114.17 U1.M11@1740.16,1114.17 ; U1.M11@1745.7,1108.63 cw(c1759.09,1095.24) 1759.09,1114.17 cw(c1759.09,1133.11) U1.M11@1745.7,1119.72
N_RST: C7.2 P3.5 P5.10 R8.1 R11.1 R32.2 S3.2 U1.L12 | length 3238.5
  Top Layer w8: U1.L12@1696.66,1157.67 ccw(c1686.68,1167.65) 1700.79,1167.65 ccw(c1714.89,1167.65) U1.L12@1704.92,1157.67 ; v1@1698.01,1190.13 cw(c1691.29,1183.42) 1700.79,1183.42 cw(c1710.28,1183.42) v1@1703.57,1190.13 ; U1.L12@1700.79,1153.54 v1(1700.79,1192.91) ; v1(1975.39,1192.91) 2047.91,1192.91 2058.07,1203.07 2058.07,1312.01 2064.17,1318.11 ; v1@1978.17,1190.13 cw(c1984.89,1183.42) 1984.89,1192.91 cw(c1984.89,1202.41) v1@1978.17,1195.69 ; P5.10@2080.21,1309.47 ccw(c2064.17,1298.9) 2064.17,1318.11 ; P5.10@2080.21,1326.75 cw(c2064.17,1337.32) 2064.17,1318.11 ; P5.10@2093.31,1318.11 2064.17,1318.11 ; v1@2312.22,1263.22 cw(c2305.5,1256.5) 2315,1256.5 cw(c2324.5,1256.5) v1@2317.78,1263.22 ; 2315,1236 R11.1@2351.44,1236 ; v1(2315,1266) 2315,1185 2318,1182 R8.1@2351.44,1182 ; R8.1@2343.13,1173.69 ccw(c2323.08,1153.64) 2323.08,1182 ccw(c2323.08,1210.36) R8.1@2343.13,1190.31 ; R11.1@2343.13,1227.69 ccw(c2323.08,1207.64) 2323.08,1236 ccw(c2323.08,1264.36) R11.1@2343.13,1244.31
  Top Layer w10: v4(2376.97,1894.69) 2398.62,1894.69 2403.54,1889.76 ; v4@2380.5,1891.15 cw(c2389.04,1882.61) 2389.04,1894.69 cw(c2389.04,1906.76) v4@2380.5,1898.22 ; S3.2@2397.06,1880.22 ccw(c2393.28,1889.76) 2403.54,1889.76 ; S3.2@2403.54,1863.82 2403.54,1889.76 ; S3.2@2410.03,1880.22 cw(c2413.81,1889.76) 2403.54,1889.76
  Bottom Layer w8: v1(1700.79,1192.91) v1(1975.39,1192.91) 1975.39,1945.83 P3.5@2026.61,1997.05 ; v1@1703.57,1190.13 cw(c1710.28,1183.42) 1710.28,1192.91 cw(c1710.28,1202.41) v1@1703.57,1195.69 ; v1@1972.61,1190.13 ccw(c1965.9,1183.42) 1965.9,1192.91 ccw(c1965.9,1202.41) 1972.61,1195.69 ccw(c1965.9,1202.41) 1975.39,1202.41 ccw(c1984.89,1202.41) v1@1978.17,1195.69 ; P3.5@2001.09,1997.05 cw(c1939.46,1997.05) 1983.04,1953.47 cw(c2026.61,1909.89) P3.5@2026.61,1971.52 ; P3.5@2009.09,1997.05 cw(c1966.77,1997.05) 1996.69,1967.13 cw(c2026.61,1937.2) P3.5@2026.61,1979.52 ; P5.10@2093.31,1302.43 cw(c2093.31,1269.31) 2116.72,1292.73 ; P5.10@2093.31,1316.14 2125.98,1283.46 2297.54,1283.46 v1(2315,1266) ; P5.10@2100.99,1318.11 ccw(c2124.3,1318.11) 2107.82,1301.63 ; P5.10@2108.99,1318.11 ccw(c2151.61,1318.11) 2121.48,1287.97 ; v1@2311.07,1266 ccw(c2301.57,1266) 2308.29,1272.71 ccw(c2315,1279.43) v1@2315,1269.93
  Bottom Layer w10: P3.5@2026.61,1997.05 2070.91,2041.34 2363.19,2041.34 2376.97,2027.56 C7.2@2376.97,1977.36 v4(2376.97,1894.69) ; P3.5@2026.61,2011.57 ccw(c2026.61,2046.65) 2051.41,2021.85 ccw(c2076.21,1997.05) P3.5@2041.14,1997.05 ; P3.5@2026.61,2021.57 ccw(c2026.61,2080.79) 2068.49,2038.92 ccw(c2110.36,1997.05) P3.5@2051.14,1997.05 ; R32.2@2369.13,1914.21 cw(c2350.21,1895.29) v4@2376.97,1895.29 ; R32.2@2369.13,1933.35 ccw(c2350.21,1952.27) 2376.97,1952.27 ; C7.2@2369.37,1967.79 cw(c2351.02,1949.45) 2376.97,1949.45 cw(c2402.92,1949.45) C7.2@2384.57,1967.79 ; C7.2@2369.37,1986.93 ccw(c2351.02,2005.28) 2376.97,2005.28 ccw(c2402.92,2005.28) C7.2@2384.57,1986.93 ; v4@2372.64,1897.18 ccw(c2361.72,1903.49) R32.2@2373.9,1906.75 ; v4@2373.43,1898.22 ccw(c2364.9,1906.76) 2376.97,1906.76 ccw(c2389.04,1906.76) v4@2380.5,1898.22 ; 2374.09,1906.02 ccw(c2385.24,1909) v4@2379.47,1899.02 ; v4@2374.47,1899.02 ccw(c2369.21,1908.13) 2379.37,1905.41 ; v4@2376.97,1896.43 cw(c2402.11,1896.43) R32.2@2384.33,1914.21 ; 2376.97,1951.13 ccw(c2402.11,1951.13) R32.2@2384.33,1933.35 ; R32.2@2379.94,1907.52 ccw(c2393.09,1903.99) v4@2381.3,1897.18
NetC13_2: C13.2 U2.4 | length 88.2
  Top Layer w15: U2.4@2557.91,1682.09 2557.91,1735.08 ; 2566.93,1744.09 2557.91,1735.08 ; C13.2@2578.29,1735.86 ccw(c2568.53,1724.47) 2557.91,1735.08
NetC24_1: C24.1 R1.2 U6.46 | length 377.1
  Top Layer w10: U6.46@2617.13,682.09 2617.13,630.91 2625,623.03 2801.18,623.03 ; R1.2@2793.58,604.06 ccw(c2775.23,622.4) 2801.18,622.4 ccw(c2827.13,622.4) R1.2@2808.78,604.06 ; C24.1@2793.58,642.01 cw(c2775.23,623.66) 2801.18,623.66 cw(c2827.13,623.66) C24.1@2808.78,642.01 ; R1.2@2801.18,594.49 C24.1@2801.18,651.57
NetC32_1: C32.1 U6.6 | length 179.1
  Top Layer w8: U6.6@2709.65,833.66 v1(2759.84,833.66) ; v1@2757.06,830.88 ccw(c2750.35,824.17) 2750.35,833.66 ccw(c2750.35,843.16) v1@2757.06,836.44
  Bottom Layer w8: v1(2759.84,833.66) C32.1@2792.32,833.66 ; v1@2761.81,830.26 cw(c2768.81,818.13) 2772.44,831.65 ; v1@2761.81,837.07 ccw(c2768.81,849.2) 2772.44,835.67 ; v1@2762.62,830.88 cw(c2769.34,824.17) 2769.34,833.66 cw(c2769.34,843.16) v1@2762.62,836.44 ; C32.1@2785,825.35 ccw(c2764.95,805.3) 2764.95,833.66 ccw(c2764.94,862.02) C32.1@2785,841.97
NetC33_2: C33.2 U6.43 Y2.2 | length 559.5
  Top Layer w10: C33.2@2305.12,534.45 2518.7,534.45 2558.07,573.82 U6.43@2558.07,682.09 ; C33.2@2314.69,526.85 cw(c2333.03,508.5) 2333.03,534.45 cw(c2333.03,560.4) C33.2@2314.69,542.05 ; Y2.2@2453.76,521.28 ccw(c2421.97,489.49) 2421.97,534.45 ccw(c2421.97,579.41) Y2.2@2453.76,547.62 ; Y2.2@2480.1,521.28 cw(c2511.89,489.49) 2511.89,534.45 cw(c2511.89,579.41) Y2.2@2480.1,547.62
NetC35_1: C35.1 U6.44 Y2.1 | length 553
  Top Layer w10: U6.44@2577.76,682.09 2577.76,574.8 2618.11,534.45 C35.1@2824.8,534.45 ; Y2.1@2653.76,521.28 ccw(c2621.97,489.49) 2621.97,534.45 ccw(c2621.97,579.41) Y2.1@2653.76,547.62 ; Y2.1@2680.1,521.28 cw(c2711.89,489.49) 2711.89,534.45 cw(c2711.89,579.41) Y2.1@2680.1,547.62 ; C35.1@2815.23,526.85 ccw(c2796.89,508.5) 2796.89,534.45 ccw(c2796.89,560.4) C35.1@2815.23,542.05
NetC36_2: C36.2 FB2.2 XTAL1.4 | length 165.6
  Top Layer w20: C36.2@1793.18,1419.16 cw(c1776.19,1402.18) 1800.22,1402.18 ; XTAL1.4@1800.22,1339.57 C36.2@1800.22,1422.22 ; C36.2@1801.31,1423.1 cw(c1818.25,1406.16) 1818.25,1430.12 ; C36.2@1802.17,1430.12 FB2.2@1847.44,1430.12
NetC37_2: C37.2 R26.1 R27.1 Y1.1 | length 735.3
  Top Layer w10: R26.1@1912.28,913.34 cw(c1930.63,895) 1930.63,920.94 cw(c1930.63,946.89) R26.1@1912.28,928.54 ; R26.1@1914.23,927.85 ccw(c1922.45,932.09) 1924.84,923.16 ; R26.1@1916.57,920.94 ccw(c1916.57,954.14) Y1.1@1949.28,948.48 ; 1928.45,920.94 ccw(c1928.45,952.09) Y1.1@1959.13,946.77 ; Y1.1@1939.43,950.19 cw(c1904.69,956.2) R26.1@1904.68,920.94 2024.57,920.94 cw(c2024.57,956.34) Y1.1@1989.7,950.23 ; Y1.1@1940.33,920.94 ccw(c1940.33,950.03) Y1.1@1968.99,945.07 ; Y1.1@1960.15,945.06 ccw(c1988.85,950.09) Y1.1@1988.85,920.94 ; Y1.1@1970,946.78 ccw(c2000.76,952.17) 2000.76,920.94 ; Y1.1@1979.85,948.51 ccw(c2012.66,954.26) 2012.66,920.94 ; 2004.37,920.94 cw(c2004.37,894.73) R27.1@2022.91,913.27 ; 2004.75,920.94 ccw(c2004.75,946.62) R27.1@2022.91,928.47 ; R27.1@2021.06,915.76 ccw(c2004.42,906.77) 2009.32,925.03 ccw(c2013.04,938.92) R27.1@2023.04,928.59 ; R27.1@2024.88,928.47 ccw(c2006.53,946.81) 2032.48,946.81 ccw(c2058.43,946.81) R27.1@2040.08,928.47 ; C37.2@2024.88,960.51 cw(c2006.53,942.16) 2032.48,942.16 cw(c2058.43,942.16) C37.2@2040.08,960.51 ; R27.1@2032.48,920.87 C37.2@2032.48,970.08
NetC38_2: C38.2 R27.2 R28.1 Y1.2 | length 735.4
  Top Layer w10: R28.1@1912.28,858.34 cw(c1930.63,840) 1930.63,865.94 cw(c1930.63,891.89) R28.1@1912.28,873.54 ; R28.1@1914.23,859.04 cw(c1922.43,854.81) 1924.81,863.72 ; R28.1@1916.5,865.94 cw(c1916.5,832.72) Y1.2@1949.27,838.22 ; 1928.32,865.94 cw(c1928.32,834.7) Y1.2@1959.13,839.87 ; Y1.2@1939.4,836.56 ccw(c1904.69,830.74) R28.1@1904.68,865.94 2024.69,865.94 ccw(c2024.68,830.46) Y1.2@1989.71,836.47 ; Y1.2@1940.13,865.94 cw(c1940.13,836.69) Y1.2@1968.99,841.52 ; Y1.2@1960.15,841.54 cw(c1989.1,836.57) Y1.2@1989.1,865.94 ; Y1.2@1970,839.85 cw(c2000.96,834.54) 2000.96,865.94 ; Y1.2@1979.86,838.16 cw(c2012.82,832.5) 2012.82,865.94 ; 2004.09,865.94 cw(c2004.09,839.33) R27.2@2022.91,858.15 ; 2005.04,865.94 ccw(c2005.04,891.22) R27.2@2022.91,873.35 ; R27.2@2021.06,870.86 cw(c2005.09,879.48) 2009.79,861.95 cw(c2013.2,849.21) R27.2@2022.74,858.32 ; C38.2@2024.88,827.09 ccw(c2006.53,845.44) 2032.48,845.44 ccw(c2058.43,845.44) C38.2@2040.08,827.09 ; R27.2@2024.88,858.15 cw(c2006.53,839.8) 2032.48,839.8 cw(c2058.43,839.8) R27.2@2040.08,858.15 ; C38.2@2032.48,817.52 R27.2@2032.48,865.75
NetF2_1: F2.1 U2.5 | length 182.8
  Top Layer w15: F2.1@2546.79,1497.5 ccw(c2519.94,1524.35) 2557.91,1524.35 ; F2.1@2557.91,1474.41 U2.5@2557.91,1607.28 ; 2557.91,1515.61 ccw(c2583.52,1515.61) F2.1@2565.41,1497.5
NetL1_2: L1.2 R34.2 | length 149.2
  Top Layer w10: L1.2@1420.55,1961.34 ccw(c1403.37,1978.52) v1@1427.67,1978.52 ; v1@1425.13,1979.36 cw(c1417.23,1974.8) 1426.04,1972.44 ; L1.2@1427.67,1954.25 1427.67,1979.84 ccw(c1452.86,1979.84) L1.2@1435.54,1961.54
  Bottom Layer w4: v1@1427.17,1981.33 v1(1427.67,1980.83)
  Bottom Layer w10: R34.2@1419.87,1998.01 cw(c1404.44,1981.33) v1@1427.17,1981.33 ; 1427.17,1989.12 ccw(c1435.95,1989.12) v1@1429.74,1982.9 ; R34.2@1427.17,2005.91 v1@1427.17,1981.33 ; 1429.29,1989.26 ccw(c1438.15,1986.88) v1@1430.21,1982.3 ; R34.2@1434.46,1998.01 ccw(c1449.89,1981.33) v1@1427.17,1981.33
NetL2_1: L2.1 R12.1 | length 318.5
  Top Layer w6: v1@2701.47,1106.73 cw(c2707.42,1096.41) 2710.5,1107.92 cw(c2713.58,1119.42) v1@2703.27,1113.47 ; v1@2701.47,1115.27 ccw(c2707.42,1125.59) 2710.5,1114.08 ccw(c2713.58,1102.58) v1@2703.27,1108.53 ; v1@2702.49,1107.51 cw(c2710.91,1099.09) 2710.91,1111 cw(c2710.91,1122.91) v1@2702.49,1114.49 ; L2.1@2720.36,1102.06 ccw(c2699,1081.03) v1(2699,1111) ; L2.1@2720.36,1119.94 cw(c2699,1140.97) v1(2699,1111) ; L2.1@2724.63,1106.27 ccw(c2713.33,1095.14) 2713.33,1111 ccw(c2713.33,1126.86) L2.1@2724.63,1115.73 ; L2.1@2729.44,1111 v1(2699,1111)
  Bottom Layer w6: R12.1@2668.56,1111 v1(2699,1111) ; R12.1@2673.37,1106.27 cw(c2684.67,1095.14) 2684.67,1111 cw(c2684.67,1126.86) R12.1@2673.37,1115.73 ; R12.1@2677.64,1102.06 cw(c2699,1081.03) v1(2699,1111) ; R12.1@2677.64,1119.94 ccw(c2699,1140.97) v1(2699,1111) ; v1@2694.73,1108.53 ccw(c2684.42,1102.58) 2687.5,1114.08 ccw(c2690.58,1125.59) v1@2696.53,1115.27 ; v1@2694.73,1113.47 cw(c2684.42,1119.42) 2687.5,1107.92 cw(c2690.58,1096.41) v1@2696.53,1106.73 ; v1@2695.51,1107.51 ccw(c2687.09,1099.09) 2687.09,1111 ccw(c2687.09,1122.91) v1@2695.51,1114.49
NetL3_2: L3.2 R31.2 | length 122.6
  Top Layer w15: L3.2@2672.24,1473.43 R31.2@2732.28,1473.43 ; L3.2@2680.05,1467.59 cw(c2694.13,1453.51) 2694.13,1473.43 cw(c2694.13,1493.34) L3.2@2680.05,1479.26 ; R31.2@2724.48,1467.59 ccw(c2710.4,1453.51) 2710.4,1473.43 ccw(c2710.4,1493.34) R31.2@2724.48,1479.26
NetL4_1: L4.1 R18.1 | length 220.2
  Top Layer w8: L4.1@2279.09,787.95 cw(c2259.04,767.9) 2287.4,767.9 cw(c2315.76,767.9) L4.1@2295.71,787.95 ; v1@2284.62,746.88 ccw(c2277.91,753.59) 2287.4,753.59 ccw(c2296.9,753.59) v1@2290.18,746.88 ; v1(2287.4,744.09) L4.1@2287.4,796.26
  Bottom Layer w8: R18.1@2279.71,727.27 ccw(c2265.15,744.09) v1(2287.4,744.09) ; v1@2284,742.13 cw(c2275.77,737.38) 2284.94,734.92 cw(c2294.11,732.47) v1@2289.37,740.69 ; v1@2284.62,741.31 cw(c2277.91,734.6) 2287.4,734.6 cw(c2296.9,734.6) v1@2290.18,741.31 ; v1@2285.44,740.69 cw(c2280.69,732.47) 2289.86,734.92 cw(c2299.03,737.38) v1@2290.81,742.13 ; R18.1@2287.4,718.39 v1(2287.4,744.09) ; R18.1@2295.09,727.27 cw(c2309.65,744.09) v1(2287.4,744.09)
NetL5_1: L5.1 R19.1 | length 221
  Top Layer w8: L5.1@2224.33,788.11 cw(c2204.28,768.06) 2232.64,768.06 cw(c2261,768.06) L5.1@2240.94,788.11 ; v1@2229.95,746.83 ccw(c2223.45,753.32) 2232.64,753.32 ; 2232.64,753.76 ccw(c2242.44,753.76) v1@2235.51,746.83 ; L5.1@2232.64,796.42 2232.64,745.32 v1@2233.86,744.09
  Bottom Layer w8: R19.1@2225.03,727.49 ccw(c2211.03,743.95) v1@2232.64,743.95 ; v1@2229.32,742.08 cw(c2221.28,737.44) 2230.25,735.04 ; v1@2229.95,741.26 cw(c2223.45,734.76) 2232.64,734.76 ; 2230.17,734.74 cw(c2239.55,732.23) v1@2234.69,740.64 ; v1@2230.76,740.64 cw(c2226.2,732.74) 2235.01,735.1 ; R19.1@2232.64,718.54 v1@2232.64,743.96 ; 2232.64,734.33 cw(c2242.44,734.33) v1@2235.51,741.26 ; v1(2232.73,744.04) 2232.78,744.09 v1@2233.86,744.09 ; 2235.15,734.59 cw(c2244.68,737.14) v1@2236.13,742.08 ; R19.1@2240.25,727.49 cw(c2254.24,743.95) v1@2232.64,743.95
NetL6_1: L6.1 R13.1 | length 318.5
  Top Layer w6: v1@2701.47,1165.73 cw(c2707.42,1155.41) 2710.5,1166.92 cw(c2713.58,1178.42) v1@2703.27,1172.47 ; v1@2701.47,1174.27 ccw(c2707.42,1184.59) 2710.5,1173.08 ccw(c2713.58,1161.58) v1@2703.27,1167.53 ; v1@2702.49,1166.51 cw(c2710.91,1158.09) 2710.91,1170 cw(c2710.91,1181.91) v1@2702.49,1173.49 ; L6.1@2720.36,1161.06 ccw(c2699,1140.03) v1(2699,1170) ; L6.1@2720.36,1178.94 cw(c2699,1199.97) v1(2699,1170) ; L6.1@2724.63,1165.27 ccw(c2713.33,1154.14) 2713.33,1170 ccw(c2713.33,1185.86) L6.1@2724.63,1174.73 ; L6.1@2729.44,1170 v1(2699,1170)
  Bottom Layer w6: R13.1@2668.56,1170 v1(2699,1170) ; R13.1@2673.37,1165.27 cw(c2684.67,1154.14) 2684.67,1170 cw(c2684.67,1185.86) R13.1@2673.37,1174.73 ; R13.1@2677.64,1161.06 cw(c2699,1140.03) v1(2699,1170) ; R13.1@2677.64,1178.94 ccw(c2699,1199.97) v1(2699,1170) ; v1@2694.73,1167.53 ccw(c2684.42,1161.58) 2687.5,1173.08 ccw(c2690.58,1184.59) v1@2696.53,1174.27 ; v1@2694.73,1172.47 cw(c2684.42,1178.42) 2687.5,1166.92 cw(c2690.58,1155.41) v1@2696.53,1165.73 ; v1@2695.51,1166.51 ccw(c2687.09,1158.09) 2687.09,1170 ccw(c2687.09,1181.91) v1@2695.51,1173.49
NetLED2_2: LED2.2 R7.1 | length 146.4
  Top Layer w4: LED2.2@1552.56,327.72 v1@1593,327.72 ; LED2.2@1558.92,321.35 cw(c1574.29,305.99) 1574.29,327.72 cw(c1574.29,349.44) LED2.2@1558.92,334.08 ; LED2.2@1561.75,318.52 cw(c1583.94,296.33) 1583.94,327.72 cw(c1583.94,359.1) LED2.2@1561.75,336.91 ; 1577.99,327.72 ccw(c1577.99,343.01) v1@1588.8,332.2 ; 1579.36,327.72 cw(c1579.36,314.36) v1@1588.8,323.8
  other v1: 1593,328
NetLS2_2: LS2.2 Q1.1 | length 393.6
  Bottom Layer w15: LS2.2@370.07,1669.32 cw(c298.77,1598.02) Q1.1@399.61,1598.02 ; LS2.2@380.68,1679.93 cw(c334.98,1634.23) 399.61,1634.23 ; Q1.1@395.87,1597.63 ccw(c384.91,1603.96) Q1.1@397.14,1607.23 ; Q1.1@399.61,1584.65 LS2.2@399.57,1698.82 ; Q1.1@399.61,1598.21 cw(c500.17,1598.21) LS2.2@429.06,1669.32 ; 399.61,1634.42 cw(c463.96,1634.42) LS2.2@418.46,1679.93 ; 402.06,1607.36 ccw(c414.45,1604.04) Q1.1@403.34,1597.63
NetQ1_2: Q1.3 R5.1 | length 148.3
  Bottom Layer w10: Q1.3@437.01,1496.06 R5.1@518.7,1496.06 ; Q1.3@441.82,1491.25 cw(c453.45,1479.62) 453.45,1496.06 cw(c453.45,1512.51) Q1.3@441.82,1500.88 ; R5.1@511.1,1488.46 ccw(c492.75,1470.11) 492.75,1496.06 ccw(c492.75,1522.01) R5.1@511.1,1503.66
NetR6_2: R6.2 SW2.1 SW2.2 SW2.3 SW2.4 | length 457.9
  Top Layer w10: SW2.4@966.7,427.82 ccw(c955.07,439.44) 971.51,439.44 ccw(c987.96,439.44) SW2.4@976.33,427.82 ; SW2.3@966.7,468.18 cw(c955.07,456.56) 971.51,456.56 cw(c987.96,456.56) SW2.3@976.33,468.18 ; SW2.3@966.7,477.82 ccw(c955.07,489.44) 971.51,489.44 ccw(c987.96,489.44) SW2.3@976.33,477.82 ; SW2.2@966.7,518.18 cw(c955.07,506.56) 971.51,506.56 cw(c987.96,506.56) SW2.2@976.33,518.18 ; SW2.2@966.7,527.82 ccw(c955.07,539.44) 971.51,539.44 ccw(c987.96,539.44) SW2.2@976.33,527.82 ; SW2.1@966.7,568.18 cw(c955.07,556.56) 971.51,556.56 cw(c987.96,556.56) SW2.1@976.33,568.18 ; SW2.1@971.51,573 SW2.2@971.51,523 SW2.3@971.51,473 SW2.4@971.51,423 v1@1047.05,423.03 ; SW2.4@1007.82,418.18 cw(c1019.53,406.48) 1019.53,423.03 ; SW2.4@1007.82,427.82 ccw(c1019.38,439.37) 1019.38,423.03 ; 1038.3,423.03 ccw(c1038.3,434.14) v1@1046.15,426.29
  Bottom Layer w10: v1(1048.23,424.21) 1069.88,424.21 1075.79,430.12 R6.2@1075.79,442.91
NetR22_2: R22.2 R25.2 U7.4 | length 265.2
  Top Layer w10: v1(3133.86,633.86) 3134.02,633.7 U7.4@3134.02,592.17 3134.02,555.94 ; v1@3148.24,553.78 cw(c3142.6,564.53) 3134.02,555.94 ; v1(3149.61,551.18) 3138.78,551.18 3134.02,555.94
  Bottom Layer w10: v1@3133.1,636.69 ccw(c3128.83,652.63) 3143.12,644.38 ; R25.2@3134.64,658.26 cw(c3121.24,646.48) v1(3133.86,633.86) 3144.69,644.68 ; R25.2@3138.51,656.56 cw(c3130.19,644.69) 3144.69,644.69 ; 3141.4,641.4 ccw(c3129.27,653.53) R25.2@3142.15,664.86 ; R25.2@3144.69,665.35 3144.69,644.68 ; 3148.94,648.94 ccw(c3137.29,660.59) R25.2@3149.67,671.46 ; R25.2@3150.86,656.56 ccw(c3159.18,644.69) 3144.68,644.69
NetR29_2: R29.2 U6.5 | length 231.5
  Top Layer w8: U6.5@2709.65,813.98 2788.39,813.98 2816.93,785.43 R29.2@2830.71,785.43 ; 2788.39,813.97 ccw(c2824.84,850.42) R29.2@2829.62,799.1 ; 2800.43,801.93 ccw(c2826.89,828.39) R29.2@2830.36,791.13 ; 2812.47,789.89 ccw(c2828.94,806.36) R29.2@2831.1,783.17
NetR30_2: R30.2 U1.G1 U1.G2 | length 154.3
  Top Layer w20: R30.2@1505.91,621.06 1505.91,650.59 1543.31,687.99 U1.G1@1543.31,720.47 U1.G2@1543.31,759.84
PTA4: R9.2 U1.L7 | length 225
  Top Layer w6: U1.L7@1700.79,949.85 cw(c1700.79,933.33) 1712.47,945.01 cw(c1724.15,956.69) U1.L7@1707.63,956.69 ; U1.L7@1700.79,956.69 v1(1720.47,937.01) ; v1@1715.54,937.01 ccw(c1703.63,937.01) 1712.05,945.43 ccw(c1720.47,953.85) v1@1720.47,941.94
  Bottom Layer w6: v1@1719.2,941.77 ccw(c1713.99,961.2) R9.2@1731.41,951.14 ; v1(1720.47,937.01) v1@1721.46,937.01 ; v1@1720.47,941.94 ccw(c1720.47,956.23) R9.2@1730.57,946.12 ; v1@1721.75,941.77 ccw(c1725.27,954.9) 1732.06,943.13 ; v1@1725.24,935.73 cw(c1735.12,933.08) 1730,941.94 ; v1@1725.41,937.01 cw(c1734.94,937.01) 1728.2,943.75 ; v1@1725.69,941.24 ccw(c1707.29,959.65) R9.2@1733.31,959.65 ; R9.2@1731.48,947.03 cw(c1745.65,932.86) R9.2@1745.96,952.9 ; R9.2@1745.87,946.9 ccw(c1745.34,913.12) v1@1721.46,937.01 ; R9.2@1746.06,961.61 v1@1721.46,937.01